# Altium PCB PCB1.PcbDoc
Units mm, origin at the board's own origin, x right, y up, seen from the top; angles counter-clockwise.
Board outline 102.62 x 60.33 mm, 4 copper layers (Top Layer, GND2, V_S_3, Bottom Layer), stack 0.778 mm thick; 68 components, 99 nets, 300 pads, 0 vias.
Unrouted connection lines stored in the file: 181.
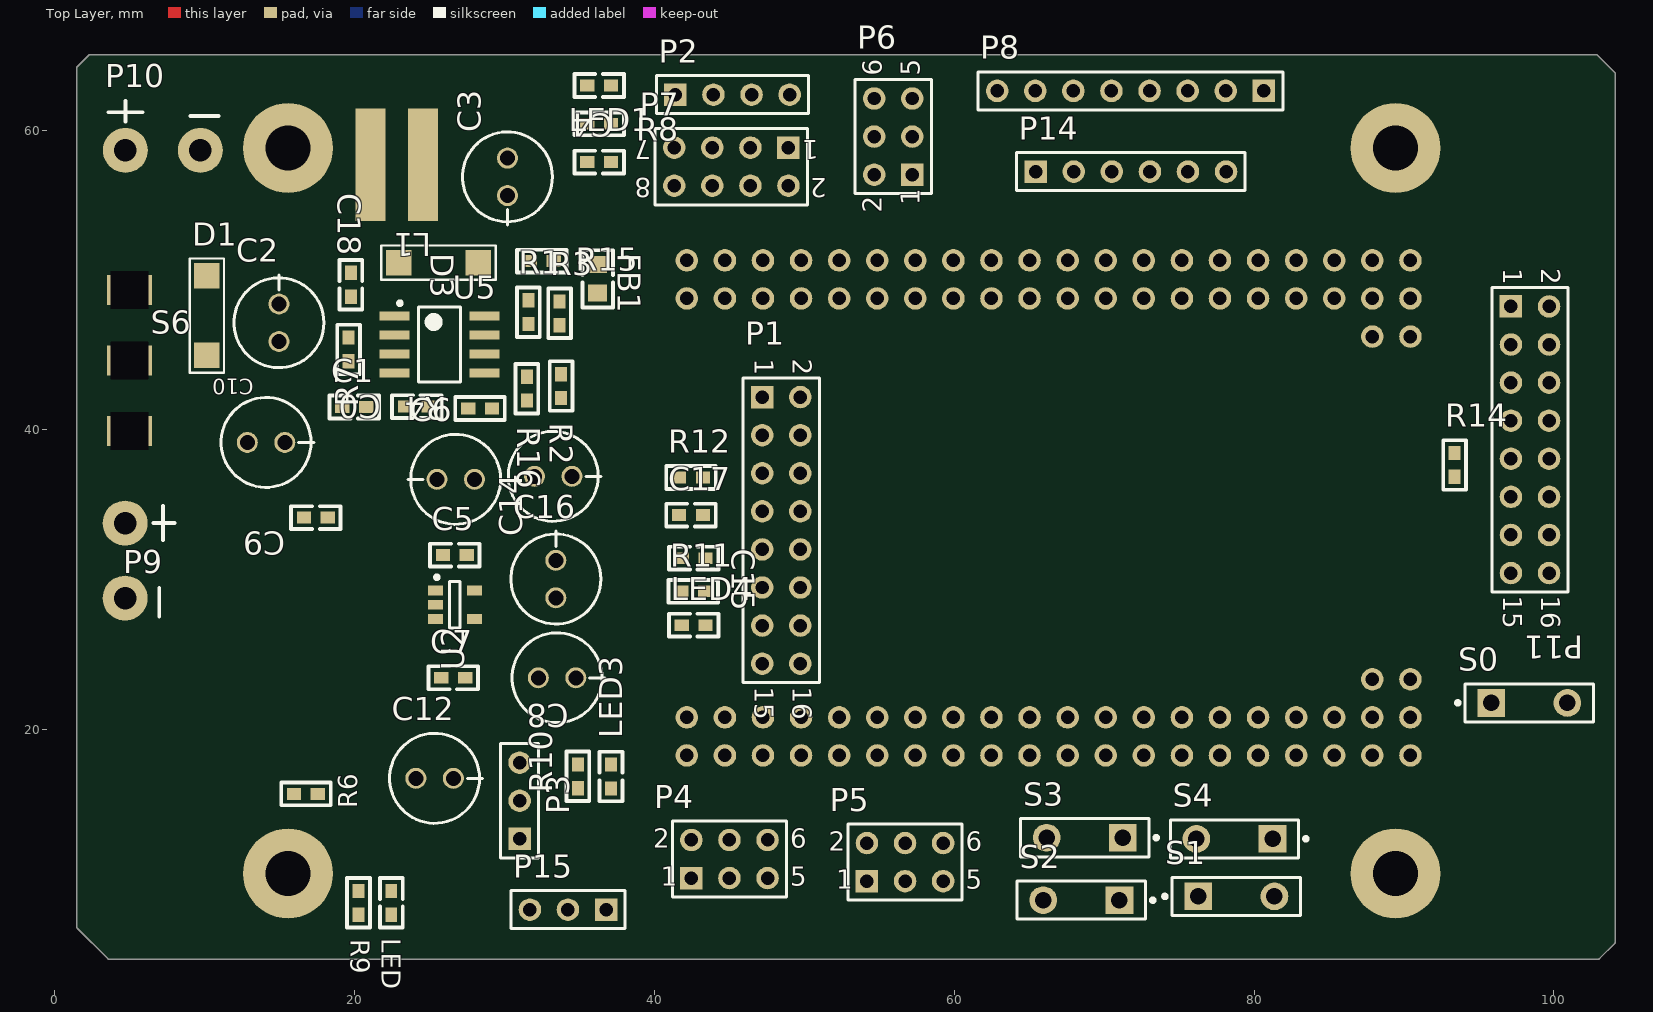
[diagram p0: Top Layer view]
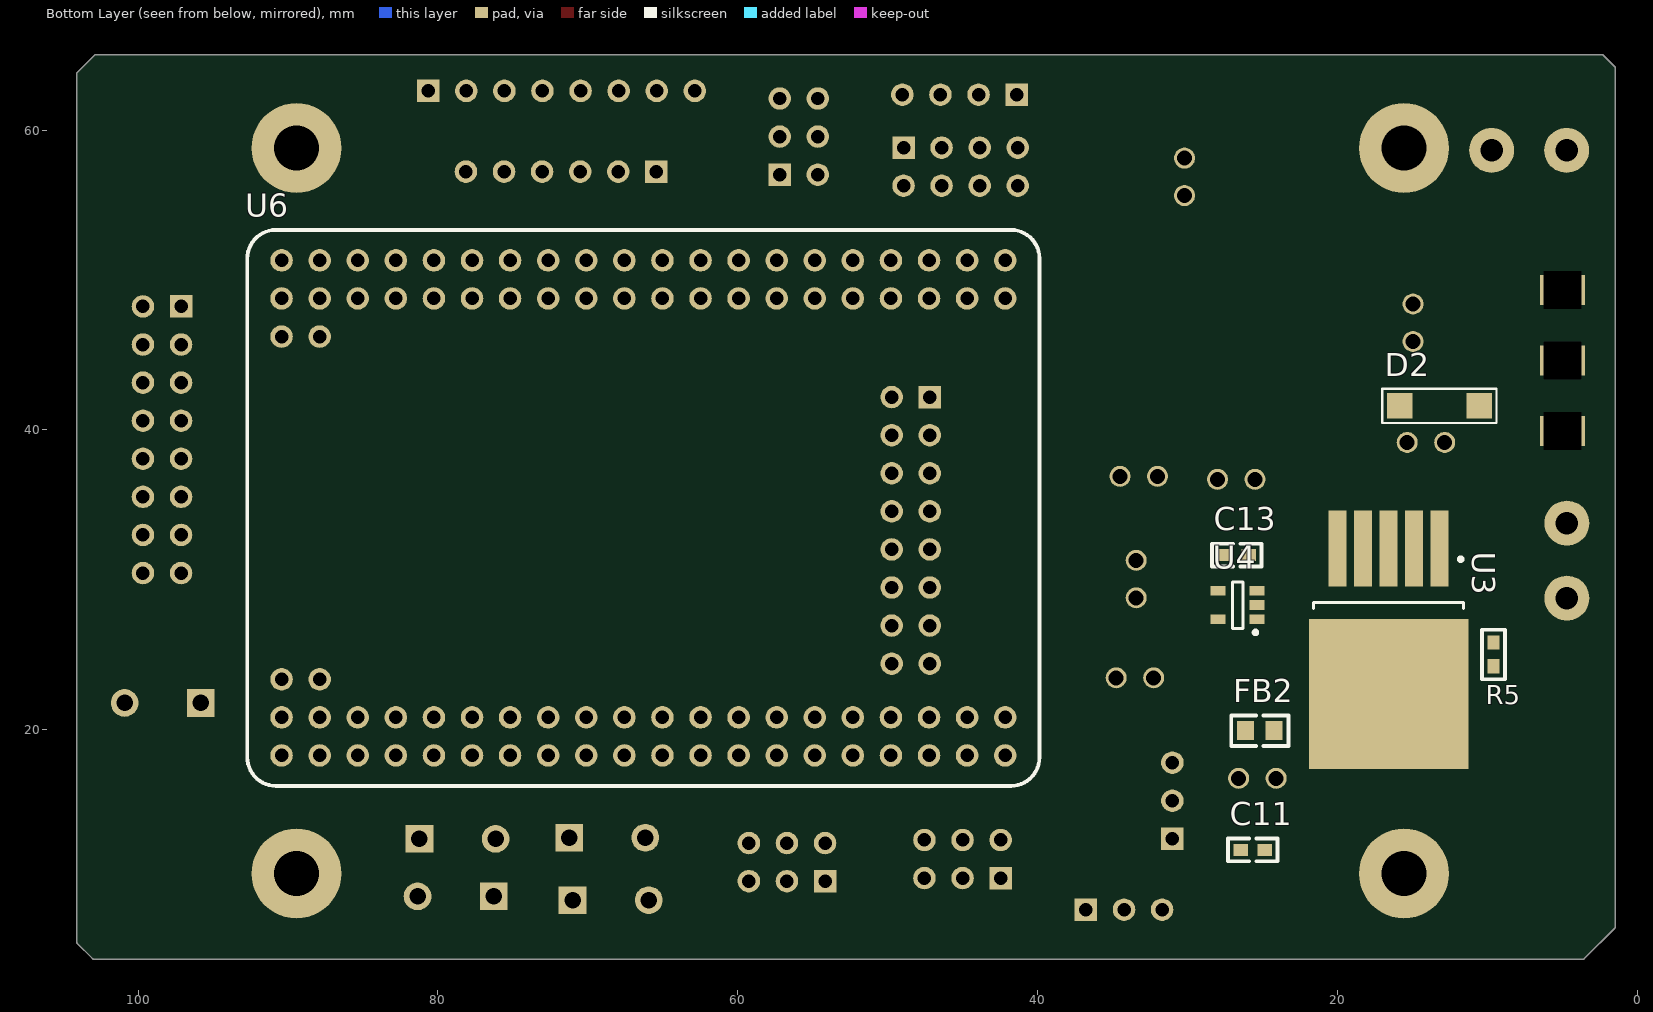
[diagram p1: Bottom Layer view, seen from below]

## Layer stack, top to bottom
Top Solder: solder mask 0.0102, Solder Resist, Dk 3.5
Top Layer: signal copper 0.0356
Dielectric 1: core 0.254, FR-4, Dk 4.2
GND2: signal copper 0.036
Dielectric 3: prepreg 0.127, Dk 4.2
V_S_3: signal copper 0.036
Dielectric 2: core 0.254, Dk 4.2
Bottom Layer: signal copper 0.0356
Bottom Solder: solder mask 0.0102, Solder Resist, Dk 3.5

## Board outline
1.511,6.767 cw(c1.6,6.858) 1.473,6.858 1.473,64.135 cw(c1.6,64.135) 1.511,64.226 1.51,64.225 2.272,64.987 cw(c2.362,64.897) 2.362,65.024 102.819,65.024 cw(c102.819,64.897) 102.91,64.987 102.909,64.987 104.052,63.844 104.052,63.845 cw(c103.962,63.754) 104.09,63.754 104.09,5.842 cw(c103.962,5.842) 104.052,5.751 104.052,5.752 103.036,4.736 103.037,4.736 cw(c102.946,4.826) 102.946,4.699 3.632,4.699 cw(c3.632,4.826) 3.542,4.736

## Design rules (kind name [scope] priority, off if disabled: settings)
Clearance [All] p1: gap=0.254 ignorepadtopadclearanceinfootprint=FALSE
PlaneClearance [All] p1: clearance=0.203
PlaneConnect [All] p1: planeconnectstyle=Direct reliefexpansion=0.508 reliefentries=4 reliefconductorwidth=0.254 reliefairgap=0.254
PolygonConnect [All] p1: connectstyle=Direct reliefconductorwidth=0.254 reliefentries=4 polygonreliefangle="90 Angle" airgapwidth=0.254
RoutingVias [All] p1: holewidth=0.305 width=0.559 viastyle="Through Hole" minholewidth=0.305 minwidth=0.559 maxholewidth=0.305 maxwidth=0.559
SolderMaskExpansion [All] p1: expansion=0.102
Width PWR [InNetClass('PWR')] p1: maxlimit=1.524 minlimit=0.381 preferedwidth=0.381
Width [All] p2: maxlimit=0.508 minlimit=0.254 preferedwidth=0.254
28 further rules are at their usual default settings.

## Classes and differential pairs
net class PWR: 3V3 GND GNDBAT GNDServo VCC5V VCCBAT VCCServo

## Components (designator, comment, footprint, x,y, rotation, side; value= is the part's Value field where it differs from the comment)
C0 "Cap" 0603C 24.155,41.554 r180 top value=1uF
C1 "Cap" 0603C 19.983,41.529 r180 top value=100nF
C2 "Cap" 电解电容 14.961,45.898 r90 top value=100uF/16V
C3 "Cap" 电解电容 30.201,58.126 r270 top value=100uF/16V
C4 "Cap" 0603C 36.316,57.861 r180 top value=100nF
C5 "Cap" 0603C 26.695,31.648 r180 top value=100nF
C6 "Cap" 电解电容 28.002,36.703 r180 top value=100uF/16V
C7 "Cap" 0603C 26.589,23.47 r0 top value=100nF
C8 "Cap" 电解电容 32.258,23.47 r0 top value=100uF/16V
C9 "Cap" 0603C 17.424,34.148 r0 top value=100nF
C10 "Cap" 电解电容 12.852,39.167 r0 top value=100uF/16V
C11 "Cap" 0603C 25.654,11.989 r180 bottom value=100nF
C12 "Cap" 电解电容 24.094,16.764 r0 top value=100uF/16V
C13 "Cap" 0603C 26.721,31.648 r180 bottom value=100nF
C14 "Cap" 电解电容 32.004,36.906 r0 top value=100uF/16V
C15 "Cap" 0603C 42.621,31.445 r180 top value=100nF
C16 "Cap" 电解电容 33.426,28.804 r90 top value=100uF/16V
C17 "Cap" 0603C 42.443,34.315 r180 top value=10uF
C18 "Cap" 0603C 19.761,49.682 r90 top value=1uF
D1 "SS54" ss54 10.16,47.625 r270 top
D2 "SS54" ss54 13.208,41.605 r180 bottom
D3 "SS54" ss54 25.603,51.156 r0 top
FB1 "0R" 0805 36.22,50.076 r270 top
FB2 "0R" 0805 25.184,19.939 r0 bottom
L1 "4.7uH" CD73 26.589,61.366 r180 top
LED1 "0" 0603C 36.316,62.967 r180 top
LED2 "0" 0603C 22.454,8.458 r90 top
LED3 "0" 0603C 37.109,16.885 r270 top
LED4 "0" 0603C 42.621,26.975 r180 top
P1 "Header 8X2" HDR2X8 47.193,42.189 r270 top
P2 "Header 4" HDR1X4 41.402,62.357 r0 top
P3 "Header 3" HDR1X3 31.013,12.725 r90 top
P4 "Header 3X2" HDR2X3 42.469,10.109 r0 top
P5 "Header 3X2" HDR2X3 54.178,9.906 r0 top
P6 "Header 3X2" HDR2X3 57.201,57.023 r90 top
P7 "Header 4X2" HDR2X4 48.946,58.826 r180 top
P8 "Header 8" HDR1X8 80.645,62.611 r180 top
P9 "Header 2" VCCBAT 4.699,29.337 r270 top
P10 "Header 2" VCCBAT 9.169,58.649 r0 top
P11 "Header 8X2" HDR2X8 97.13,48.235 r270 top
P14 "Header 6" HDR1X6 65.43,57.226 r0 top
P15 "Header 3" HDR1X3 36.779,8.001 r180 top
R1 "Res2" 0603R 31.598,47.854 r90 top value=51k
R2 "Res2" 0603R 33.782,42.926 r270 top value=47
R3 "Res2" 0603R 33.68,47.777 r270 top value=130k
R4 "Res2" 0603R 28.372,41.427 r0 top value=100k
R5 "Res2" 0603R 9.601,25.025 r90 bottom value=100k
R6 "Res2" 0603R 16.764,15.723 r0 top value=360k
R7 "Res2" 0603R 19.609,45.364 r90 top value=10R
R8 "Res2" 0603R 36.316,60.414 r180 top value=4.7k
R9 "Res2" 0603R 20.269,8.458 r90 top value=5.6k
R10 "Res2" 0603R 34.9,16.891 r270 top value=2.2k
R11 "Res2" 0603R 42.596,29.235 r180 top value=2.2k
R12 "Res2" 0603R 42.443,36.83 r180 top value=10k
R14 "Res2" 0603R 93.37,37.662 r90 top value=10k
R15 "Res2" 0603R 32.487,51.257 r0 top value=27k
R16 "Res2" 0603R 31.496,42.755 r90 top value=5.1K
S0 "" SPST-2 98.349,21.793 r0 top
S1 "" SPST-2 78.816,8.89 r0 top
S2 "" SPST-2 68.478,8.636 r180 top
S3 "" SPST-2 68.707,12.802 r180 top
S4 "" SPST-2 78.689,12.725 r180 top
S6 "SW-SPDT" SW 5.004,44.628 r270 top
U2 "RT9013-33" SOT23-5_L 26.695,28.346 r0 top
U3 "LM2941" TO-263-5L 16.586,27.239 r270 bottom
U4 "RT9013-33" SOT23-5_L 26.67,28.321 r0 bottom
U5 "MP2482" SOIC-8 25.679,45.695 r0 top
U6 "MIMXRT1064xVL_CoreBoard" MIMXRT1064XVL_COREBOARD 66.294,34.798 r0 bottom

## Footprints (in the part's own frame and the unit in brackets; to place one, negate y for a bottom-side part, rotate by r counter-clockwise, add the part's x,y. Pads: shape width x height; smd on the part's side, far side on the other; paste and mask are expansions set on the pad)
0603C [mil]
  rect 37.5x31 smd: 1(-31.25,0) 2(31.25,0)
  silkscreen extent -65,-30 65,30
0603R [mil]
  rect 37.5x31 smd: 1(-31.25,0) 2(31.25,0)
  silkscreen extent -65,-30 65,30
0805 [mil]
  rect 45x50 smd: 1(-37.5,0) 2(37.5,0)
  silkscreen extent -75,-40 75,40
CD73 [mm]
  rect 1.5x7.5 smd: 16(2.032,3.683)
  rect 2x7.5 smd: 16(2.032,3.683) 17(5.532,3.683)
HDR1X3 [mm] "Connector; Header; 3 Position"
  rect 1.5x1.5 hole 0.9: 1(0,0)
  round 1.5 hole 0.9: 2(2.54,0) 3(5.08,0)
  silkscreen extent -1.27,-1.27 6.35,1.27
HDR1X4 [mm] "Connector; Header; 4 Position"
  rect 1.5x1.5 hole 0.9: 1(0,0)
  round 1.5 hole 0.9: 2(2.54,0) 3(5.08,0) 4(7.62,0)
  silkscreen extent -1.27,-1.27 8.89,1.27
HDR1X6 [mm] "Connector; Header; 6 Position"
  rect 1.5x1.5 hole 0.9: 1(0,0)
  round 1.5 hole 0.9: 2(2.54,0) 3(5.08,0) 4(7.62,0) 5(10.16,0) 6(12.7,0)
  silkscreen extent -1.27,-1.27 13.97,1.27
HDR1X8 [mm] "Connector; Header; 8 Position"
  rect 1.5x1.5 hole 0.9: 1(0,0)
  round 1.5 hole 0.9: 2(2.54,0) 3(5.08,0) 4(7.62,0) 5(10.16,0) 6(12.7,0) 7(15.24,0) 8(17.78,0)
  silkscreen extent -1.27,-1.27 19.05,1.27
HDR2X3 [mm] "Connector; Header; 3x2 Position"
  rect 1.5x1.5 hole 0.9: 1(0,0)
  round 1.5 hole 0.9: 2(0,2.54) 3(2.54,0) 4(2.54,2.54) 5(5.08,0) 6(5.08,2.54)
  silkscreen extent -1.27,-1.27 6.35,3.81
HDR2X4 [mm] "Connector; Header; 4x2 Position"
  rect 1.5x1.5 hole 0.9: 1(0,0)
  round 1.5 hole 0.9: 2(0,2.54) 3(2.54,0) 4(2.54,2.54) 5(5.08,0) 6(5.08,2.54) 7(7.62,0) 8(7.62,2.54)
  silkscreen extent -1.27,-1.27 8.89,3.81
HDR2X8 [mm] "Connector; Header; 8x2 Position"
  rect 1.5x1.5 hole 0.9: 1(0,0)
  round 1.5 hole 0.9: 2(0,2.54) 3(2.54,0) 4(2.54,2.54) 5(5.08,0) 6(5.08,2.54) 7(7.62,0) 8(7.62,2.54) 9(10.16,0) 10(10.16,2.54) 11(12.7,0) 12(12.7,2.54) 13(15.24,0) 14(15.24,2.54) 15(17.78,0) 16(17.78,2.54)
  silkscreen extent -1.27,-1.27 19.05,3.81
MIMXRT1064XVL_COREBOARD [mm] "逐飞科技i.MX RT1064核心板整体封装"
  round 1.5 hole 0.9: 1(-24.13,-16.51) 2(-24.13,-13.97) 3(-21.59,-16.51) 4(-21.59,-13.97) 5(-19.05,-16.51) 6(-19.05,-13.97) 7(-16.51,-16.51) 8(-16.51,-13.97) 9(-13.97,-16.51) 10(-13.97,-13.97) 11(-11.43,-16.51) 12(-11.43,-13.97) 13(-8.89,-16.51) 14(-8.89,-13.97) 15(-6.35,-16.51) 16(-6.35,-13.97) 17(-3.81,-16.51) 18(-3.81,-13.97) 19(-1.27,-16.51) 20(-1.27,-13.97) 21(1.27,-16.51) 22(1.27,-13.97) 23(3.81,-16.51) 24(3.81,-13.97) 25(6.35,-16.51) 26(6.35,-13.97) 27(8.89,-16.51) 28(8.89,-13.97) 29(11.43,-16.51) 30(11.43,-13.97) 31(13.97,-16.51) 32(13.97,-13.97) 33(16.51,-16.51) 34(16.51,-13.97) 35(19.05,-16.51) 36(19.05,-13.97) 37(21.59,-16.51) 38(21.59,-13.97) 39(24.13,-16.51) 40(24.13,-13.97) 41(21.59,-11.43) 42(24.13,-11.43) 43(24.13,11.43) 44(21.59,11.43) 45(24.13,13.97) 46(24.13,16.51) 47(21.59,13.97) 48(21.59,16.51) 49(19.05,13.97) 50(19.05,16.51) 51(16.51,13.97) 52(16.51,16.51) 53(13.97,13.97) 54(13.97,16.51) 55(11.43,13.97) 56(11.43,16.51) 57(8.89,13.97) 58(8.89,16.51) 59(6.35,13.97) 60(6.35,16.51) 61(3.81,13.97) 62(3.81,16.51) 63(1.27,13.97) 64(1.27,16.51) 65(-1.27,13.97) 66(-1.27,16.51) 67(-3.81,13.97) 68(-3.81,16.51) 69(-6.35,13.97) 70(-6.35,16.51) 71(-8.89,13.97) 72(-8.89,16.51) 73(-11.43,13.97) 74(-11.43,16.51) 75(-13.97,13.97) 76(-13.97,16.51) 77(-16.51,13.97) 78(-16.51,16.51) 79(-19.05,13.97) 80(-19.05,16.51) 81(-21.59,13.97) 82(-21.59,16.51) 83(-24.13,13.97) 84(-24.13,16.51)
  silkscreen extent -26.42,-18.54 26.42,18.54
SOIC-8 [mm]
  rect 2x0.6 smd: 1(-3,1.905) 2(-3,0.635) 3(-3,-0.635) 4(-3,-1.905) 5(3,-1.905) 6(3,-0.635) 7(3,0.635) 8(3,1.905)
  silkscreen extent -2.77,-2.5 1.4,2.88, body extent -3.05,-2.44 3.05,2.46, height 1.51
SOT23-5_L [mm] "SOT23, 6-Leads, Body 2.9x1.6mm, Pitch 0.95mm, Lead Span 2.7mm, IPC High Density"
  rect 1x0.65 smd: 1(-1.3,0.95) 2(-1.3,0) 3(-1.3,-0.95) 4(1.3,-0.95) 5(1.3,0.95)
  silkscreen extent -1.32,-1.55 0.35,1.95, body extent -1.36,-1.5 1.14,1.5, height 1.05
SPST-2 [mm] "Switch; 2 Leads"
  rect 1.85x1.85 hole 1.1: 1(-2.54,0)
  round 1.85 hole 1.1: 2(2.54,0)
  silkscreen extent -4.89,-1.27 4.28,1.27
ss54 [mm]
  rect 1.7x1.7 smd: A(-2.65,0) K(2.65,0)
  silkscreen extent -3.81,-1.14 3.81,1.14
SW [mm]
  rect 2x3 hole 2.5 square: 1(-4.7,0) 2(0,0) 3(4.7,0)
TO-263-5L [mm]
  rect 5.08x1.2 smd: 1(-4.845,3.4) 2(-4.845,1.7) 3(-4.845,0) 4(-4.845,-1.7) 5(-4.845,-3.4)
  rect 10x10.66 smd: 6(4.845,0)
  silkscreen extent -4.26,-5 -0.86,5, body extent -4.34,-5.05 9.67,5.11, height 4.58
VCCBAT [mm]
  round 3 hole 1.5: 1(-4.445,0) 1(0.555,0)
  silkscreen extent -5.59,1.9 1.78,3.3
电解电容 [mm]
  round 1.4 hole 1: 1(0,0) 2(2.5,0)
  silkscreen extent -1.75,-3 4.44,3

## Part data
C0 C1 C4 C5 C7 C9 C11 C13 C15 C17 C18: "Capacitor", LatestRevisionDate=17-Jul-2002, LatestRevisionNote="Re-released for DXP Platform.", PackageDescription="Radial Cap, Thru-Hole; 2 Leads; 0.3 in Pin Spacing", PackageReference=RAD-0.3, Published=8-Jun-2000, Publisher="Altium Limited"
C2 C3 C6 C8 C10 C12 C14 C16: library part Cap2, "Capacitor", LatestRevisionDate=17-Jul-2002, LatestRevisionNote="Re-released for DXP Platform.", PackageDescription="Radial Cap, Thru-Hole; 2 Leads; 0.3 in Pin Spacing", PackageReference=RAD-0.3, Published=8-Jun-2000, Publisher="Altium Limited"
D1 D2 D3: library part Diode_1, "Default Diode", Code_JEDEC=DO-214-AB, LatestRevisionDate=17-Jul-2002, LatestRevisionNote="Re-released for DXP Platform.", PackageDescription="DO-214-AB/SMC; 2 C-Bend Leads; Body 7.9 x 5.9 mm, inc. leads (LxW)", PackageReference=SMC, PackageVersion=Sep-1996, Published=8-Jun-2000, Publisher="Altium Limited"
FB1 FB2: library part FB, "Inductor", Code_IEC=1005, Code_JEITA=0402, LatestRevisionDate=29-May-2009, LatestRevisionNote="IPC-7351 Footprint Added.", PackageDescription="Chip Inductor", PackageReference=0402-A, Published=8-Jun-2000, Publisher="Altium Limited"
L1: library part Inductor_2, "Inductor", Code_IEC=1005, Code_JEITA=0402, LatestRevisionDate=29-May-2009, LatestRevisionNote="IPC-7351 Footprint Added.", PackageDescription="Chip Inductor", PackageReference=0402-A, Published=8-Jun-2000, Publisher="Altium Limited"
LED1 LED2 LED3 LED4: library part LED2, "Typical RED, GREEN, YELLOW, AMBER GaAs LED", LatestRevisionDate=17-Jul-2002, LatestRevisionNote="Re-released for DXP Platform.", PackageDescription="SM LED; 2 Flat Leads", PackageReference=3.2X1.6X1.1, PackageVersion=Feb-2002, Published=8-Jun-2000, Publisher="Altium Limited"
P1 P11: "Header, 8-Pin, Dual row", LatestRevisionDate=17-Jul-2002, LatestRevisionNote="Re-released for DXP Platform.", Publisher="Altium Limited"
P2 U3: "Header, 4-Pin", LatestRevisionDate=17-Jul-2002, LatestRevisionNote="Re-released for DXP Platform.", Publisher="Altium Limited"
P3 P15: "Header, 3-Pin", LatestRevisionDate=17-Jul-2002, LatestRevisionNote="Re-released for DXP Platform.", Publisher="Altium Limited"
P4 P5 P6: "Header, 3-Pin, Dual row", LatestRevisionDate=17-Jul-2002, LatestRevisionNote="Re-released for DXP Platform.", Publisher="Altium Limited"
P7: "Header, 4-Pin, Dual row", LatestRevisionDate=17-Jul-2002, LatestRevisionNote="Re-released for DXP Platform.", Publisher="Altium Limited"
P8: "Header, 8-Pin 陀螺仪 直插向下有点面积", LatestRevisionDate=17-Jul-2002, LatestRevisionNote="Re-released for DXP Platform.", Publisher="Altium Limited"
P9: library part "Header 2_1", "Header, 2-Pin", LatestRevisionDate=17-Jul-2002, LatestRevisionNote="Re-released for DXP Platform.", Publisher="Altium Limited"
P10: library part "Header 2_2", "Header, 2-Pin", LatestRevisionDate=17-Jul-2002, LatestRevisionNote="Re-released for DXP Platform.", Publisher="Altium Limited"
P14: "Header, 6-Pin 电磁弯针 焊下面", LatestRevisionDate=17-Jul-2002, LatestRevisionNote="Re-released for DXP Platform.", Publisher="Altium Limited"
R1 R2 R4 R5 R7 R8 R10 R11 R12 R14 R15 R16: "Resistor", LatestRevisionDate=17-Jul-2002, LatestRevisionNote="Re-released for DXP Platform.", PackageDescription="Axial Device, Thru-Hole; 2 Leads; 0.4 in Pin Spacing", PackageReference=AXIAL-0.4, Published=8-Jun-2000, Publisher="Altium Limited"
R3: "Resistor 改成了120k", LatestRevisionDate=17-Jul-2002, LatestRevisionNote="Re-released for DXP Platform.", PackageDescription="Axial Device, Thru-Hole; 2 Leads; 0.4 in Pin Spacing", PackageReference=AXIAL-0.4, Published=8-Jun-2000, Publisher="Altium Limited"
R6: "Resistor 改成了330k", LatestRevisionDate=17-Jul-2002, LatestRevisionNote="Re-released for DXP Platform.", PackageDescription="Axial Device, Thru-Hole; 2 Leads; 0.4 in Pin Spacing", PackageReference=AXIAL-0.4, Published=8-Jun-2000, Publisher="Altium Limited"
R9: "Resistor改成了5.1k", LatestRevisionDate=17-Jul-2002, LatestRevisionNote="Re-released for DXP Platform.", PackageDescription="Axial Device, Thru-Hole; 2 Leads; 0.4 in Pin Spacing", PackageReference=AXIAL-0.4, Published=8-Jun-2000, Publisher="Altium Limited"
S0 S1 S2 S3 S4: library part SW-PB, "Switch", LatestRevisionDate=17-Jul-2002, LatestRevisionNote="Re-released for DXP Platform.", PackageDescription="Switch; 2 Leads", PackageReference=SPST-2, Published=24-Mar-1999, Publisher="Altium Limited"
S6: "SPDT Subminiature Toggle Switch, Right Angle Mounting, Vertical Actuation", ComponentLink1Description="Manufacturer Link", ComponentLink1URL=http://www.apem.com, DatasheetVersion=05-Dec-2000, LatestRevisionDate=17-Dec-2003, LatestRevisionNote="Schematic revised, PCB Footprint replaced.", PackageDescription="Switch; 4 Leads", PackageReference=TL36WW15050, Published=24-Mar-1999, Publisher="Altium Limited"
U6: "逐飞科技i.MX RT1064核心板整体原理，可直接使用"

## Free pads (board coordinates)
  round 6 hole 3: 0(15.57,10.414) 0(15.57,58.801) 0(89.433,10.414) 0(89.433,58.801)

## Nets (pads, with @x,y where several pads share a name; then routed paths per layer and width w, separated by ;. In a path a pad name is that pad's centre, name@x,y a point inside that pad or via, vN(x,y) a via of type N, cw(c..) or ccw(c..) an arc to the next point about the centre after c; other vN are vias at no path point)
3V3: C7.2 C8.1 P1.4 P4.2 P5.2 P8.1 P14.2 P15.3 R10.2 U2.5
B0: P1.6 U6.23
B1: P1.8 U6.24
B2: P1.10 U6.25
B3: P1.14 U6.26
B9: U6.49
B10: U6.48
B11: U6.47
B12: P2.4 U6.29
B13: P2.3 U6.27
B14: P14.1 U6.30
B15: P14.4 U6.28
B16: P1.1 U6.32
B17: P1.3 U6.31
B18: P1.5 U6.34
B19: P1.7 U6.33
B20: P11.15 U6.36
B21: P14.5 U6.35
B22: P11.5 U6.38
B23: P14.6 U6.37
B24: P11.2 U6.40
B25: P11.4 U6.39
B26: P11.6 U6.42
B27: P11.8 U6.41
B28: P11.10 U6.46
B29: P11.12 U6.45
B30: P11.14 U6.43
B31: P11.16 U6.44
C0: P4.3 U6.82
C1: P4.4 U6.79
C2: P5.3 U6.80
C3: U6.77
C4: U6.78
C5: 
C6: U6.76
C7: U6.73
C8: U6.74
C9: U6.71
C10: U6.72
C11: U6.69
C12: U6.70
C13: U6.67
C14: U6.68
C15: U6.65
C16: U6.66
C17: U6.63
C18: P1.16 U6.64
C19: P1.12 U6.61
C20: P8.6 U6.62
C21: P8.5 U6.59
C22: P8.4 U6.60
C23: P8.3 U6.57
C24: P5.4 U6.58
C25: P15.1 U6.55 U6.75
C26: S4.1 U6.56
C27: S3.1 U6.53
C28: P11.9 U6.54
C29: P11.11 U6.51
C30: P3.1 U6.52
C31: S2.1 U6.50
CR: C17.2 R12.2 U2.3 U4.3
CSI_3V3: C15.2 C16.1 P11.1 R11.2 U4.5
D0: P6.6 U6.14
D1: P6.5 U6.13
D2: P6.2 U6.12
D3: P6.1 U6.11
D4: S0.1 U6.10
D12: P1.9 U6.15
D13: P1.11 U6.16
D14: P1.13 U6.17
D15: P1.15 U6.18
D16: P7.1 U6.19
D17: P7.3 U6.20
D26: P7.4 U6.84
D27: S1.1 U6.81
GND: C3.2 C4.1 C5.1 C6.2 C7.1 C8.2 C13.1 C14.2 C15.1 C16.2 C17.1 FB1.1 LED1.2 LED3.2 LED4.2 P1.2 P2.2 P4.1 P5.1 P6.3 P6.4 P7.5 P7.6 P8.2 P11.3 P11.13 P14.3 P15.2 R14.1 S0.2 S1.2 S2.2 S3.2 S4.2 U2.2 U4.2 U6.1 U6.2 U6.83
GNDBAT: C0.2 C1.1 C2.2 C9.1 C10.2 D3.K FB1.2 FB2.1 P9.1@4.699,28.782 P10.1@9.724,58.649 R2.1 R3.1 R5.1 U3.2 U3.3 U3.6 U5.4
GNDServo: C11.1 C12.2 FB2.2 LED2.2 P3.3
NetC0_1: C0.1 R4.2 U5.3
NetC1_2: C1.2 C2.1 D1.A R1.2 U5.8
NetC9_2: C9.2 C10.1 D2.A U3.4
NetC18_1: C18.1 R7.2
NetC18_2: C18.2 D3.A L1.17 U5.1
NetLED1_1: LED1.1 R8.1
NetLED2_1: LED2.1 R9.1
NetLED3_1: LED3.1 R10.1
NetLED4_1: LED4.1 R11.1
NetP9_1: P9.1@4.699,33.782 S6.3
NetP11_7: P11.7 R14.2
NetR1_1: R1.1 R3.2 U5.7
NetR2_2: R2.2 R16.1
NetR4_1: R4.1 U5.6
NetR5_2: R5.2 R6.1 U3.1
NetR7_1: R7.1 U5.2
NetR12_1: R12.1 U6.9
NetR15_1: R15.1 R16.2 U5.5
VCC5V: C3.1 C4.2 C5.2 C6.1 C13.2 C14.1 L1.16 P2.1 P7.7 R8.2 R15.2 U2.1 U4.1 U6.5 U6.6
VCCBAT: D1.K D2.K P10.1@4.724,58.649 S6.1 S6.2
VCCServo: C11.2 C12.1 P3.2 R6.2 R9.2 U3.5
pads on no net: P4.5 P4.6 P5.5 P5.6 P7.2 P7.8 P8.7 P8.8 U2.4 U4.4 U6.3 U6.4 U6.7 U6.8 U6.21 U6.22

## Silkscreen, mask and mechanical layers (free items; w line width, h text height)
Mechanical 1:
  lines w0.254: 97.358,4.826 102.946,4.826 103.962,5.842 103.962,20.32 103.962,49.276 103.962,63.754 102.819,64.897 2.362,64.897 1.6,64.135 1.6,6.858 3.632,4.826 10.49,4.826 97.612,4.826

## Text inside footprints (layer, text, board x,y; h text height)
P1: Top Overlay "2" at 49.225,44.729 h1.27 r270; Top Overlay "1" at 46.685,44.729 h1.27 r270; Top Overlay "15" at 46.685,22.885 h1.27 r270; Top Overlay "16" at 49.225,22.885 h1.27 r270
P4: Top Overlay "6" at 49.073,12.141 h1.27; Top Overlay "5" at 49.073,9.601 h1.27; Top Overlay "2" at 39.929,12.141 h1.27; Top Overlay "1" at 40.437,9.601 h1.27
P5: Top Overlay "6" at 60.782,11.938 h1.27; Top Overlay "5" at 60.782,9.398 h1.27; Top Overlay "2" at 51.638,11.938 h1.27; Top Overlay "1" at 52.146,9.398 h1.27
P6: Top Overlay "6" at 55.169,63.627 h1.27 r90; Top Overlay "5" at 57.709,63.627 h1.27 r90; Top Overlay "2" at 55.169,54.483 h1.27 r90; Top Overlay "1" at 57.709,54.991 h1.27 r90
P7: Top Overlay "2" at 51.486,56.794 h1.27 r180; Top Overlay "1" at 50.978,59.334 h1.27 r180; Top Overlay "7" at 39.802,59.334 h1.27 r180; Top Overlay "8" at 39.802,56.794 h1.27 r180
P11: Top Overlay "2" at 99.162,50.775 h1.27 r270; Top Overlay "1" at 96.622,50.775 h1.27 r270; Top Overlay "15" at 96.622,28.931 h1.27 r270; Top Overlay "16" at 99.162,28.931 h1.27 r270